# Altium PCB labos2.PcbDoc
Units mm, origin at the board's own origin, x right, y up, seen from the top; angles counter-clockwise.
Board outline 57 x 50 mm, 2 copper layers (Top Layer, Bottom Layer); 24 components, 19 nets, 68 pads, 0 vias.
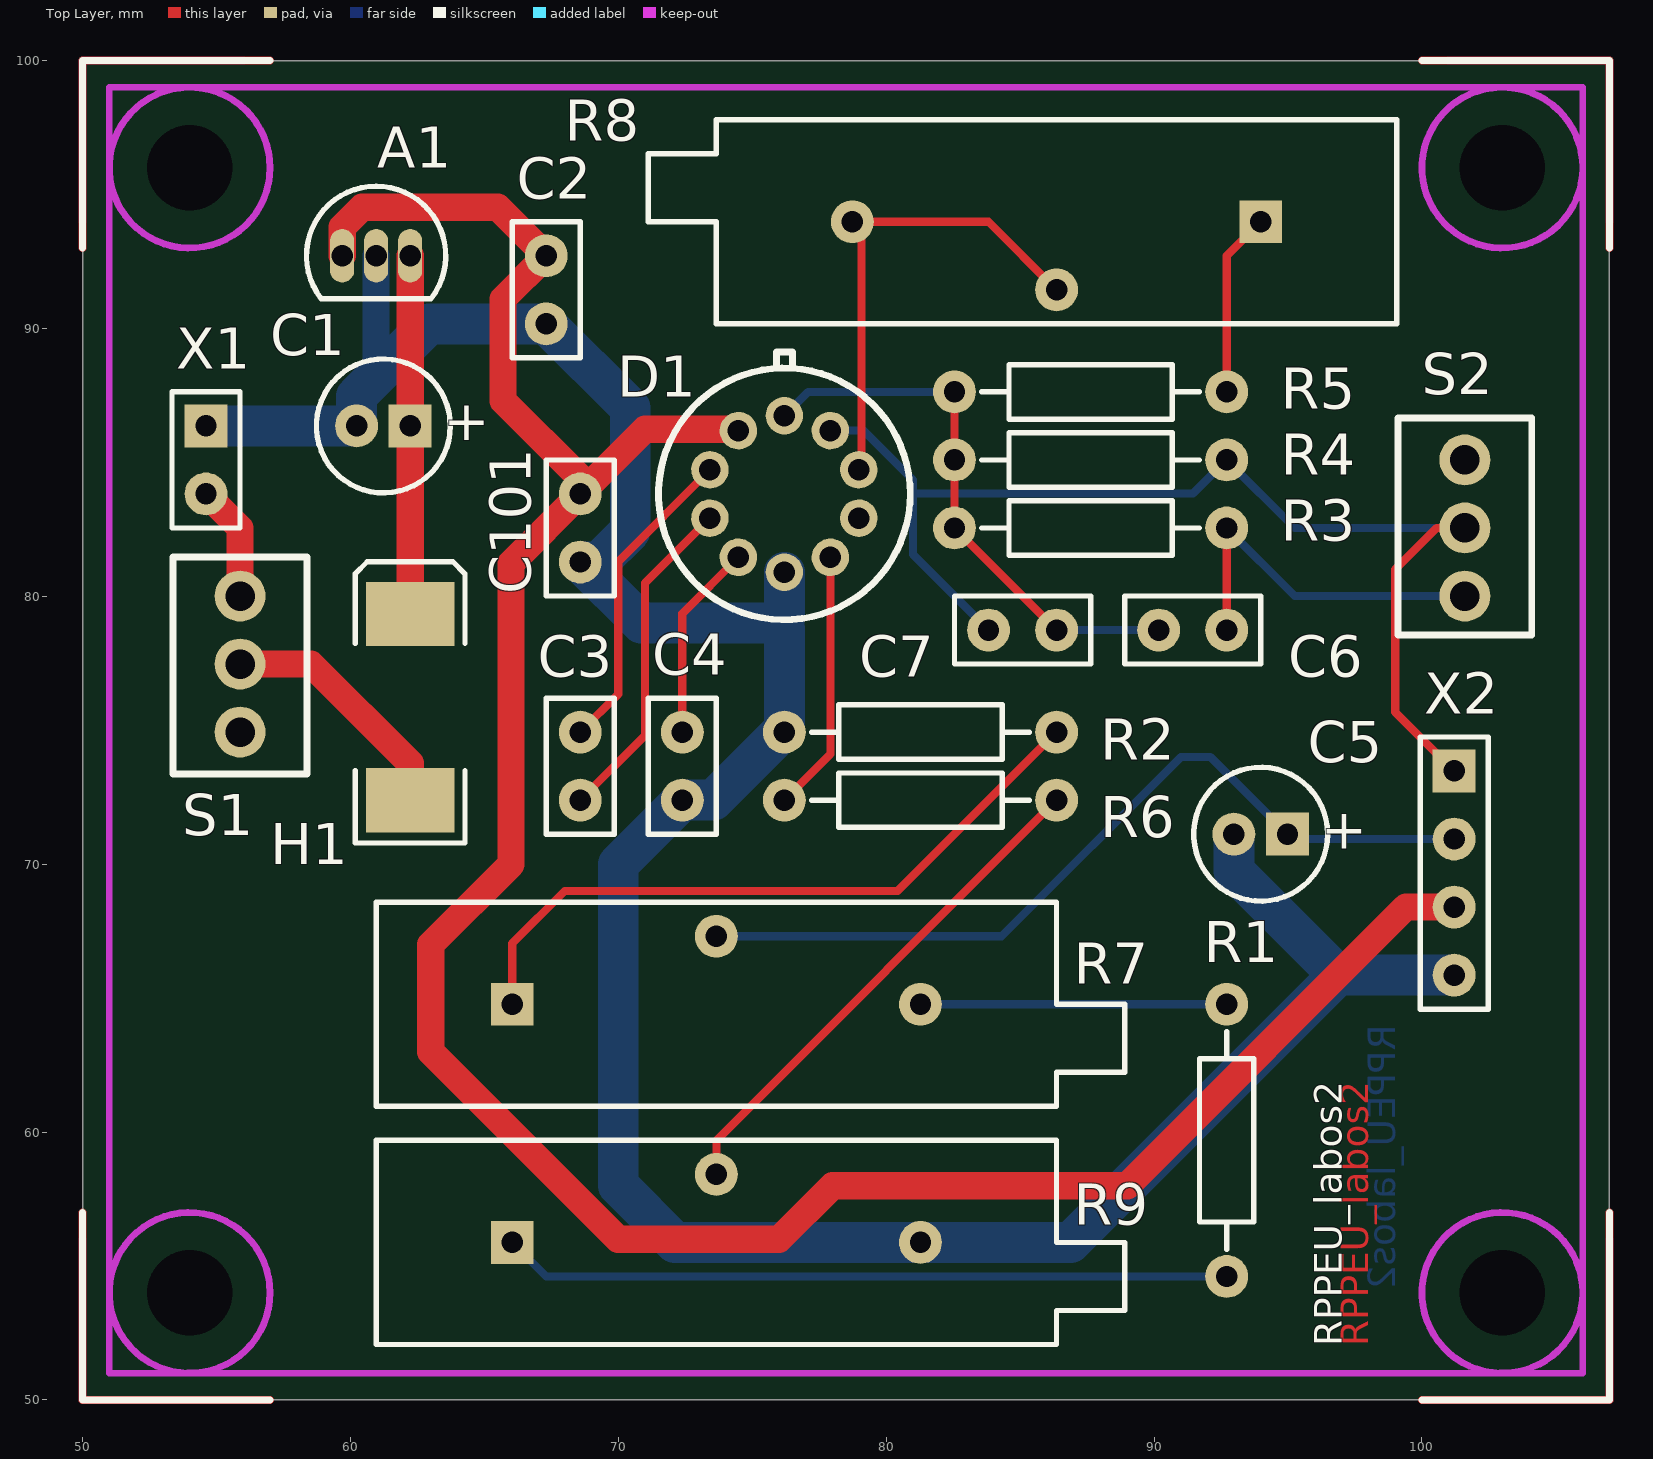
[diagram p0: Top Layer view]
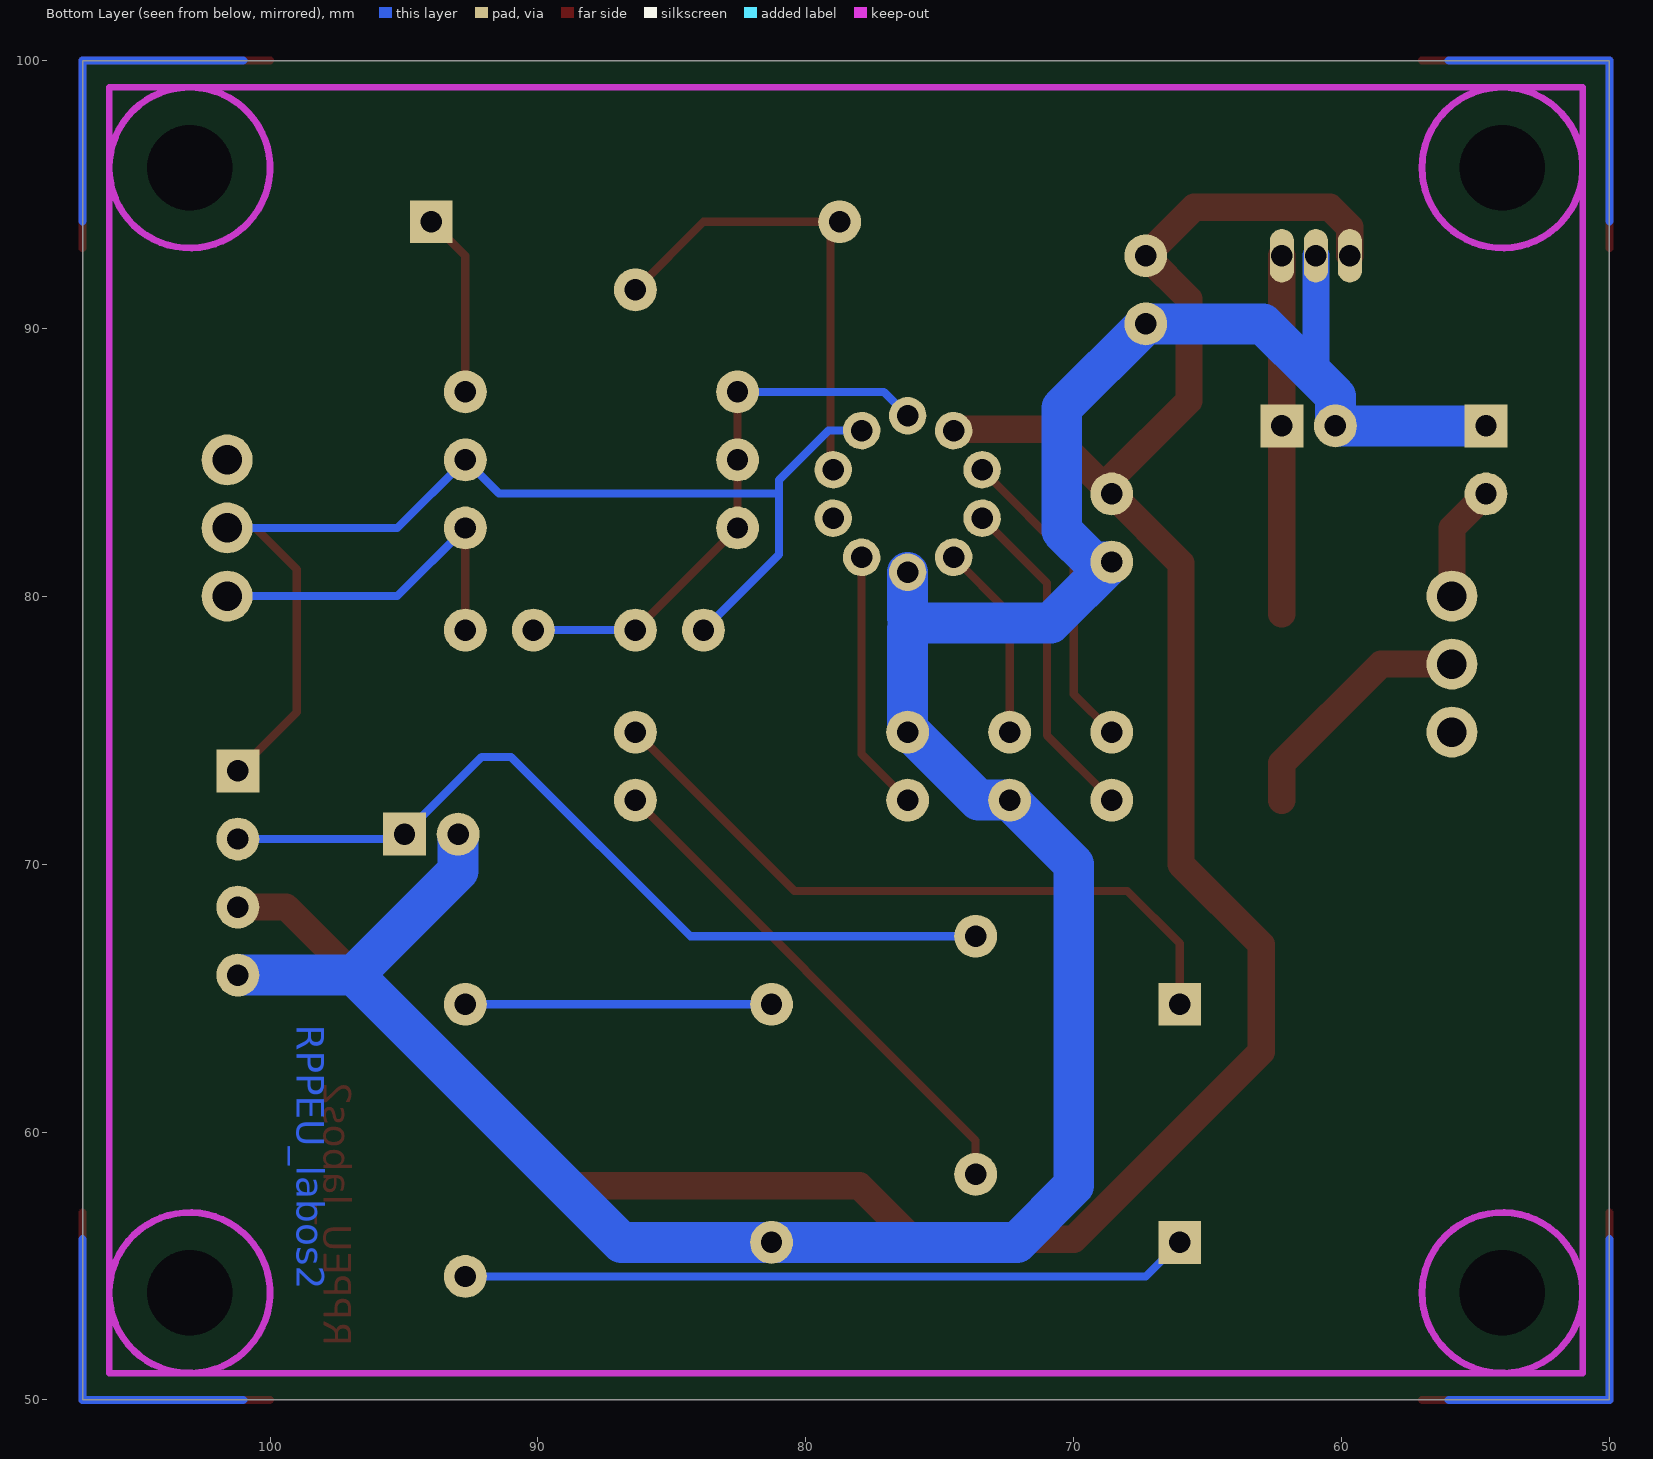
[diagram p1: Bottom Layer view, seen from below]

## Layer stack, top to bottom
Top Layer: signal copper 0.0356
Dielectric: dielectric 0.32, FR-4, Dk 4.8
Bottom Layer: signal copper 0.0356

## Board outline
50,50 50,100 107,100 107,50

## Design rules (kind name [scope] priority, off if disabled: settings)
Clearance [All] p1: gap=0.305
HoleSize [All] p1: absolutevalues=TRUE maxlimit=3.2 minlimit=0.025 maxpercent=80.000 minpercent=20.000
MinimumSolderMaskSliver [All] p1: minsoldermaskwidth=0.051
PolygonConnect [All] p1: connectstyle=Relief reliefconductorwidth=0.254 reliefentries=4 polygonreliefangle="90 Angle"
RoutingVias [All] p1: holewidth=0.711 width=1.27 viastyle="Through Hole" minholewidth=0.711 minwidth=1.27 maxholewidth=0.711 maxwidth=1.27
SilkscreenOverComponentPads [All] p1: minsilkscreentomaskgap=0.051
SolderMaskExpansion [All] p1: expansion=0.102
TestPointUsage [All] p1: valid=0 allowmultiple=FALSE
Testpoint [All] p1: side=15 testpointundercomponent=TRUE minsize=1.016 maxsize=2.54 preferedsize=1.524 minholesize=0 maxholesize=1.016 preferedholesize=0.813 testpointgrid=0.025 style=1023 order=0123456789
Width [All] p1: maxlimit=1.524 minlimit=0.254 preferedwidth=0.254 toplayer_minwidth=0.305 toplayer_prefwidth=0.305 bottomlayer_minwidth=0.305 bottomlayer_prefwidth=0.305 minimp=50.000000 maximp=50.000000 favimp=50.000000
21 further rules are at their usual default settings.

## Components (designator, comment, footprint, x,y, rotation, side; value= is the part's Value field where it differs from the comment)
A1 "µA78L05CLP" LP03 60.96,92.71 r270 top
C1 "100u/16V" CAPPR2-5x11 61.23,86.36 r180 top
C2 "100n" RAD-0.1 67.31,91.44 r90 top
C3 "22n" RAD-0.1 68.58,73.66 r90 top
C4 "22n" RAD-0.1 72.39,73.66 r270 top
C5 "4u7/10V" CAPPR2-5x11 93.98,71.12 r180 top
C6 "1u" RAD-0.1 91.44,78.74 r0 top
C7 "100n" RAD-0.1 85.09,78.74 r180 top
C101 "100n" RAD-0.1 68.58,82.55 r90 top
D1 "ADXL05JH" ADXL05 76.2,83.82 r90 top
H1 "1N4001" SMC 62.23,75.865 r90 top
R1 "22k" AXIAL-0.4 92.71,59.69 r270 top
R2 "22k" AXIAL-0.4 81.28,74.93 r0 top
R3 "3k16, 1%" AXIAL-0.4 87.63,82.55 r0 top
R4 "28k7, 1%" AXIAL-0.4 87.63,85.09 r0 top
R5 "47k" AXIAL-0.4 87.63,87.63 r180 top
R6 "270k" AXIAL-0.4 81.28,72.39 r0 top
R7 "5k" VR2 73.66,66.04 r0 top
R8 "20k" VR2 86.36,92.71 r180 top
R9 "50k" VR2 73.66,57.15 r0 top
S1 "SW-SPST" TOOGLE 55.88,80.01 r270 top
S2 "SW-SPDT" TOOGLE 101.6,80.01 r90 top
X1 "Napajanje" HDR1X2 54.61,86.36 r270 top
X2 "Pokaznik" HDR1X4 101.2,73.48 r270 top

## Footprints (in the part's own frame and the unit in brackets; to place one, negate y for a bottom-side part, rotate by r counter-clockwise, add the part's x,y. Pads: shape width x height; smd on the part's side, far side on the other; paste and mask are expansions set on the pad)
ADXL05 [mm]
  round 1.4 hole 0.8: 1(2.363,1.717) 2(0.903,2.778) 3(-0.903,2.778) 4(-2.363,1.717) 5(-2.921,0) 6(-2.363,-1.717) 7(-0.903,-2.778) 8(0.903,-2.778) 9(2.363,-1.717) 10(2.921,0)
  silkscreen extent -4.7,-4.7 5.3,4.7
AXIAL-0.4 [mm] "Resistor; 2 Leads"
  round 1.6 hole 0.8: 1(-5.08,0) 2(5.08,0)
  silkscreen extent -4.06,-1.02 4.06,1.02
CAPPR2-5x11 [mm] "Capacitor, Electrolytic, Radial; Body 5 x 11 mm (Dia.xH typ); Pin Spacing 2 mm (typ)"
  rect 1.6x1.6 hole 0.8: 1(-1,0)
  round 1.6 hole 0.8: 2(1,0)
  silkscreen extent -2.5,-2.5 2.5,2.5
HDR1X2 [mm] "Connector; Header; 2 Position"
  rect 1.6x1.6 hole 0.8: 1(0,0)
  round 1.6 hole 0.8: 2(2.54,0)
  silkscreen extent -1.27,-1.27 3.81,1.27
HDR1X4 [mm] "Connector; Header; 4 Position"
  rect 1.6x1.6 hole 0.8: 1(0,0)
  round 1.6 hole 0.8: 2(2.54,0) 3(5.08,0) 4(7.62,0)
  silkscreen extent -1.27,-1.27 8.89,1.27
LP03 [mm] "TO, Flat Index; 3 In-Line, Axial Leads; Body Dia. 4.8mm; Leads 0.56 x 0.41 mm (max)"
  oval 2x0.9 hole 0.8: 1(0,-1.27) 2(0,0) 3(0,1.27)
  silkscreen extent -2.6,-2.6 1.6,2.6
RAD-0.1 [mm] "Indicating Instrument; 2 Leads"
  round 1.6 hole 0.8: 1(-1.27,0) 2(1.27,0)
  silkscreen extent -2.54,-1.27 2.54,1.27
SMC [mm] "DO-214-AB/SMC; 2 C-Bend Leads; Body 7.9 x 5.9 mm, inc. leads (LxW)"
  rect 2.4x3.3 smd: 1(-3.475,0) 2(3.475,0)
  silkscreen extent -5.07,-2.05 5.43,2.05
TOOGLE [mm]
  round 1.9 hole 1.1: 1(0,0) 2(2.54,0) 3(5.08,0)
  silkscreen extent -1.46,-2.5 6.64,2.5
VR2 [mm]
  rect 1.6x1.6 hole 0.8: 1(-7.62,-1.27)
  round 1.6 hole 0.8: 2(0,1.27) 3(7.62,-1.27)
  silkscreen extent -12.7,-5.08 15.24,2.54

## Part data
A1: "Positive-Voltage Regulator"
C1 C5: library part "Cap Pol2", "Polarized Capacitor (Axial)"
C2 C3 C4 C6 C7 C101: library part Cap, "Capacitor"
H1: library part Diode, "Default Diode"
R1 R2 R3 R4 R5 R6: library part Res2, "Resistor"
R7 R8 R9: library part Trimmer
S1: "Single-Pole, Single-Throw Switch"
S2: "SPDT Subminiature Toggle Switch, Right Angle Mounting, Vertical Actuation"
X1: library part "Header 2", "Header, 2-Pin"
X2: library part "Header 4", "Header, 4-Pin"

## Free pads (board coordinates)
  round 3 hole 3.2: 0(54,54) 1(103,54) 2(103,96) 3(54,96)

## Nets (pads, with @x,y where several pads share a name; then routed paths per layer and width w, separated by ;. In a path a pad name is that pad's centre, name@x,y a point inside that pad or via, vN(x,y) a via of type N, cw(c..) or ccw(c..) an arc to the next point about the centre after c; other vN are vias at no path point)
DVM+: C5.1 R7.2 X2.2 | length 31.6
  Bottom Layer w0.305: R7.2 84.31,67.31 91,74 92.1,74 C5.1 95.16,70.94 X2.2
DVM-: C7.2 D1.9 R4.2 S2.2 X2.1 | length 44.9
  Top Layer w0.305: X2.1 99,75.68 99,81 100.55,82.55 S2.2
  Bottom Layer w0.305: D1.9@78.22,85.88 D1.9 79.154,86.183 81,84.337 81,83.833 ; C7.2 81,81.56 81,83.833 ; S2.2 95.25,82.55 R4.2 91.453,83.833 81,83.833
GND: A1.2 C1.2 C2.1 C4.2 C5.2 C101.1 D1.5 R2.1 R9.3 X1.1 X2.4 | length 108.6
  Bottom Layer w1.016: 60.96,88.199 A1.2
  Bottom Layer w1.524: X1.1 C1.2 60.23,87.469 60.96,88.199 62.931,90.17 C2.1 70.447,87.033 70.447,82.447 69.28,81.28 C101.1 70.86,79 76,79 ; D1.5 76.2,79.2 76,79 ; C5.2 92.98,69.74 96.86,65.86 ; X2.4 96.86,65.86 ; 76,79 76.2,78.8 R2.1 76.1,74.93 73.56,72.39 C4.2 70,70 70,58 72.12,55.88 R9.3 86.88,55.88 96.86,65.86
NetA1_3: A1.3 C1.1 H1.2 | length 13.4
  Top Layer w1.016: H1.2 C1.1 A1.3
NetC3_1: C3.1 D1.3 | length 12.5
  Top Layer w0.305: C3.1 71,74.81 71,80.495 D1.3
NetC3_2: C3.2 D1.2 | length 11.8
  Top Layer w0.305: C3.2 70,76.35 70,81.301 D1.2
NetC4_1: C4.1 D1.4 | length 7.4
  Top Layer w0.305: C4.1 72.39,79.364 D1.4
NetC6_1: C6.1 C7.1 D1.10 R3.1 R4.1 R5.2 | length 21
  Top Layer w0.305: R5.2 R4.1 R3.1 C7.1
  Bottom Layer w0.305: D1.10 77.089,87.63 R5.2 ; C7.1 C6.1
NetC6_2: C6.2 R3.2 S2.1 | length 13.8
  Top Layer w0.305: C6.2 R3.2
  Bottom Layer w0.305: R3.2 95.25,80.01 S2.1
NetD1_6: D1.6 R6.1 | length 9.8
  Top Layer w0.305: R6.1 77.917,74.107 D1.6
NetD1_8: D1.8 R8.2 R8.3 | length 18.1
  Top Layer w0.305: D1.8 79.074,84.819 79.074,93.646 R8.3 83.82,93.98 R8.2
NetH1_1: H1.1 S1.2 | length 9.3
  Top Layer w1.016: S1.2 58.53,77.47 62.23,73.77 H1.1
NetR1_1: R1.1 R7.3 | length 11.4
  Bottom Layer w0.305: R7.3 R1.1
NetR1_2: R1.2 R9.1 | length 27.2
  Bottom Layer w0.305: R9.1 67.31,54.61 R1.2
NetR2_2: R2.2 R7.1 | length 25.9
  Top Layer w0.305: R7.1 66.04,67.04 68,69 80.43,69 R2.2
NetR5_1: R5.1 R8.1 | length 6.9
  Top Layer w0.305: R5.1 92.71,92.71 R8.1
NetR6_2: R6.2 R9.2 | length 19.2
  Top Layer w0.305: R9.2 73.66,59.69 R6.2
NetS1_1: S1.1 X1.2 | length 4.3
  Top Layer w1.016: X1.2 55.88,82.55 S1.1
VCC: A1.1 C2.2 C101.2 D1.1 X2.3 | length 96.1
  Top Layer w1.016: A1.1 59.697,92.717 59.697,93.783 60.437,94.523 65.497,94.523 C2.2 65.697,91.097 65.697,87.303 C101.2@68.58,84.42 ; D1.1@74.431,86.235 70.995,86.235 C101.2 66,81.24 66,70 63,67 63,63 70,56 76,56 78,58 89,58 99.4,68.4 X2.3
pads on no net: D1.7 S1.3 S2.3
copper on no net: | length 104
  Top Layer w0.305: 50,57 50,50 57,50 ; 50,93 50,100 57,100 ; 100,50 107,50 107,57 ; 100,100 107,100 107,93
  Bottom Layer w0.305: 50,56 50,50 56,50 ; 50,94 50,100 56,100 ; 101,50 107,50 107,56 ; 101,100 107,100 107,94

## Keep-outs
Keep-Out Layer:
  circle w0.254: c54,54 r3
  circle w0.254: c54,96 r3
  circle w0.254: c103,96 r3
  circle w0.254: c103,54 r3
  lines w0.254: 51,51 51,99 106,99 106,51 51,51

## Other copper
Top Layer:
  text "RPPEU_labos2" at 98,52 h1.02 r90
Bottom Layer:
  text "RPPEU_labos2" at 99,64 h1.02 r90

## Silkscreen, mask and mechanical layers (free items; w line width, h text height)
Top Overlay:
  lines w0.254: 50,57 50,50 57,50 ; 50,93 50,100 57,100 ; 100,50 107,50 107,57 ; 100,100 107,100 107,93
  text "RPPEU_labos2" at 97,52 h1.02 r90
Mechanical 1:
  the board outline again, w0.254
Drill Drawing:
  text ".Legend" at 120,82 h1.02

## Dimensions
107,50 to 107,100 on Mechanical 2
50,50 to 107,50 on Mechanical 2

## Text inside footprints (layer, text, board x,y; h text height)
C1: Top Overlay "+" at 65.205,87.11 h1.5 r180
C5: Top Overlay "+" at 97.955,71.87 h1.5 r180